# Altium PCB 智能温控风扇.PcbDoc
Units mil, origin at the board's own origin, x right, y up, seen from the top; angles counter-clockwise.
Board outline 3411.14 x 3030.03 mil, 2 copper layers (Top Layer, Bottom Layer); 30 components, 32 nets, 150 pads, 24 vias.
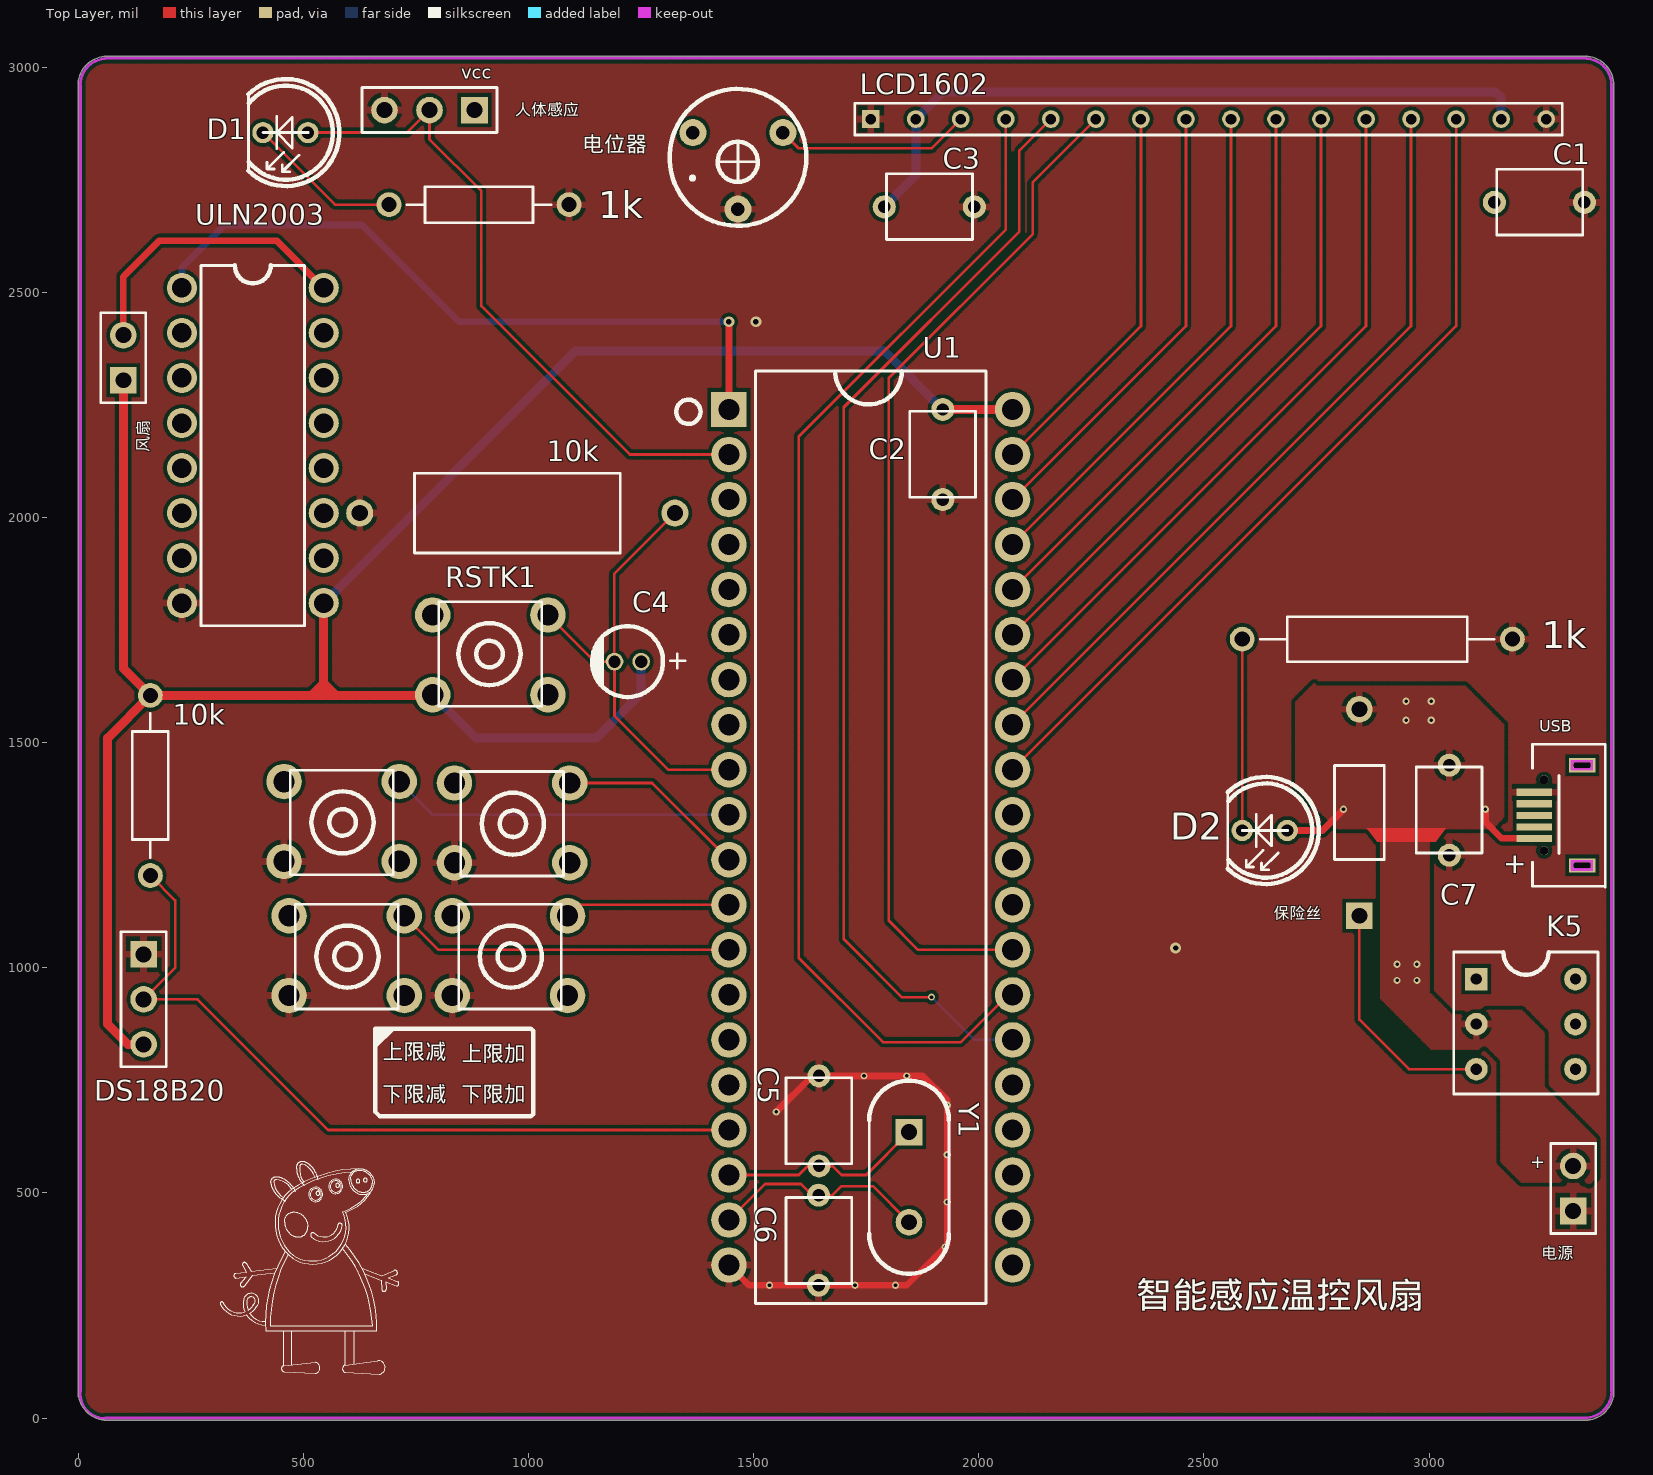
[diagram p0: Top Layer view]
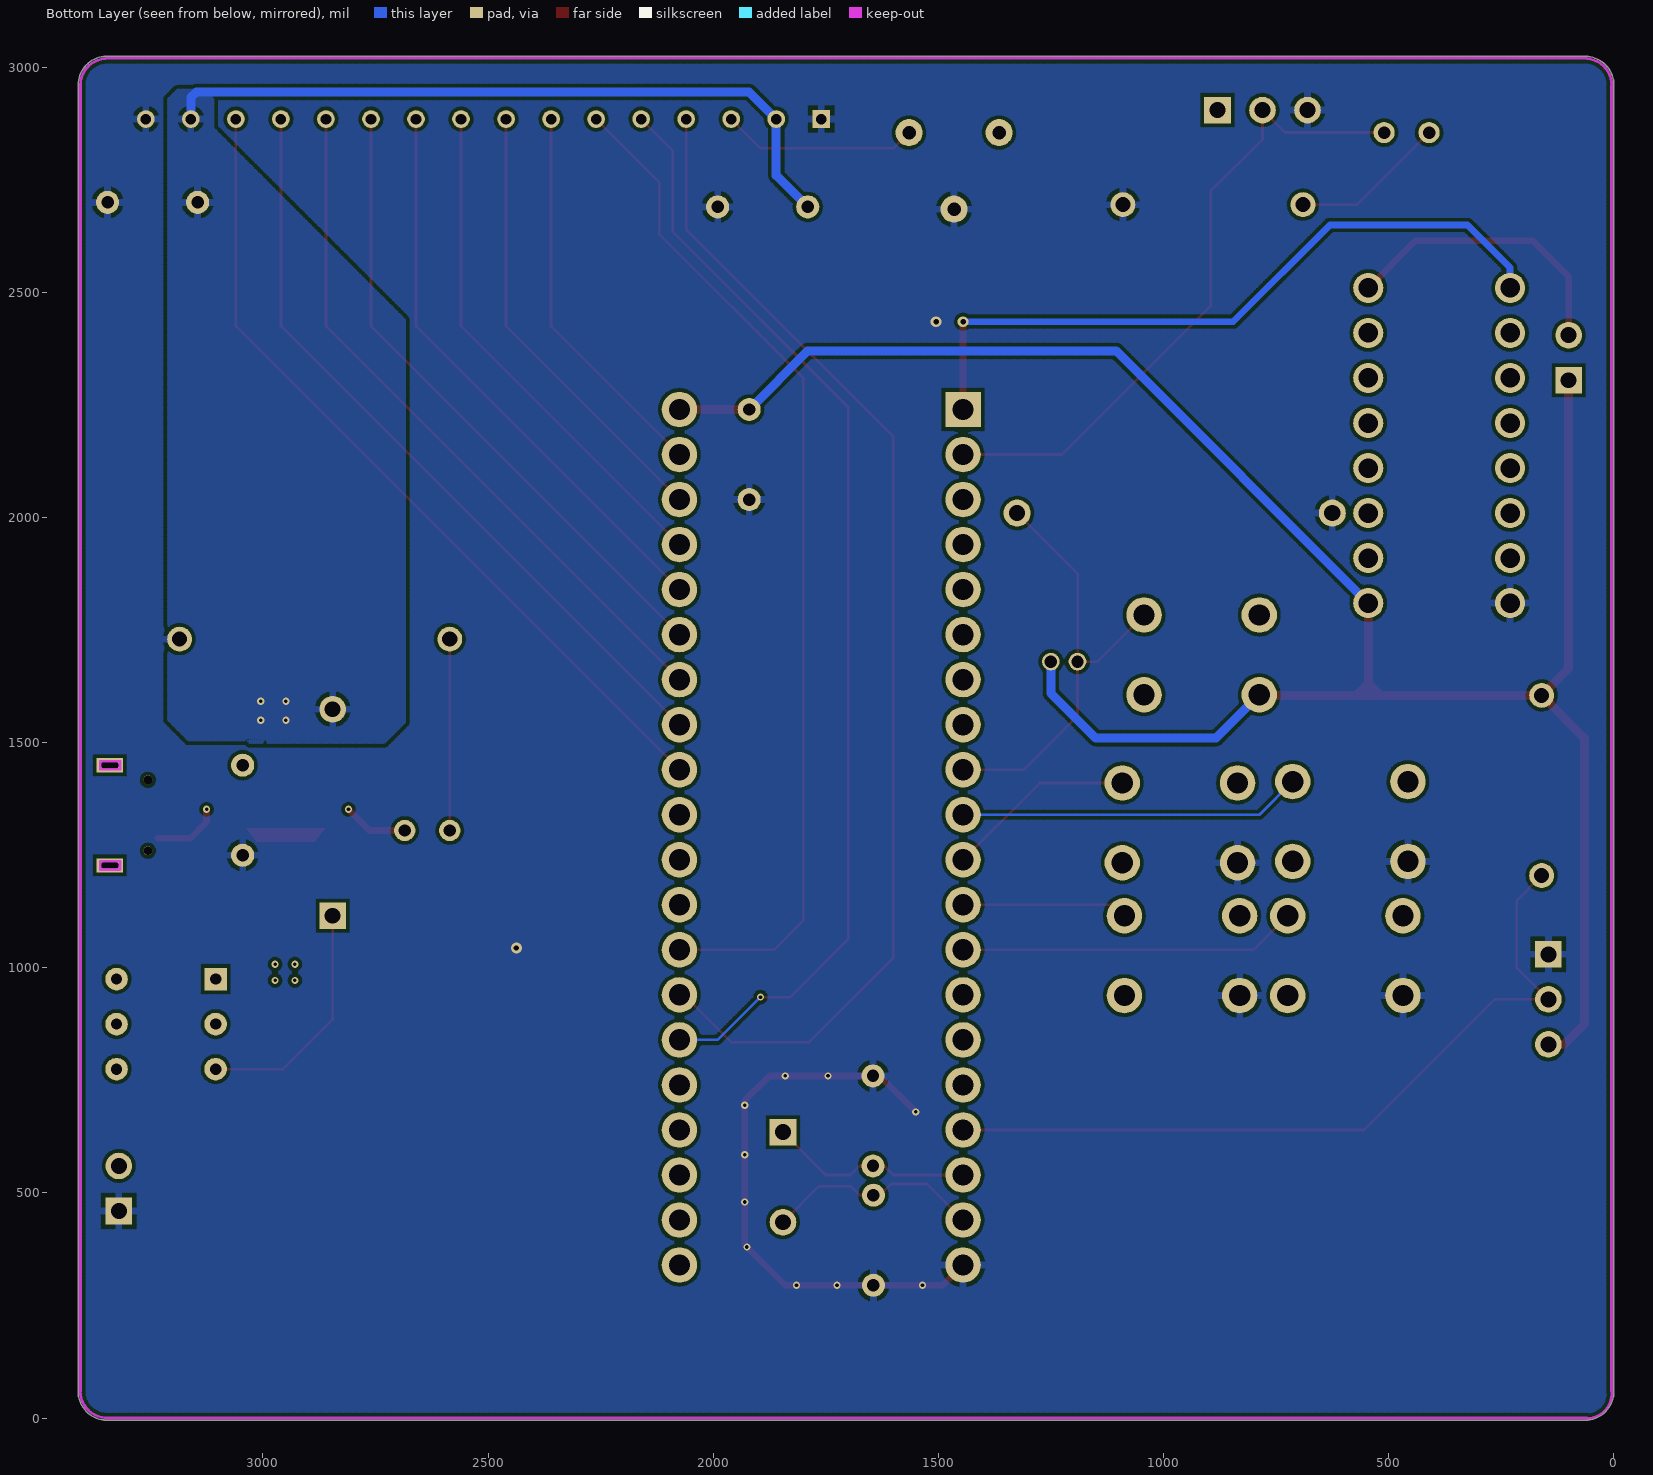
[diagram p1: Bottom Layer view, seen from below]

## Layer stack, top to bottom
Top Solder: solder mask 0.4, Solder Resist, Dk 3.5
Top Layer: signal copper 1.4
Dielectric 1: dielectric 12.6, FR-4, Dk 4.8
Bottom Layer: signal copper 1.4
Bottom Solder: solder mask 0.4, Solder Resist, Dk 3.5

## Board outline
-0.57,59.66 ccw(c63.67,59.66) 56.71,-4.2 ccw(c59.45,0) 59.45,-5.02 3350.55,-5.02 ccw(c3350.55,0) 3353.29,-4.2 ccw(c3346.33,59.66) 3410.57,59.66 ccw(c3405.55,59.66) 3410.02,61.95 3410.02,2959 ccw(c3405.28,2960.64) 3410.29,2960.64 ccw(c3346.64,2960.64) 3353.35,3023.93 ccw(c3350.24,3020) 3350.24,3025.02 60.03,3025.02 ccw(c60,3020) 57.37,3024.27 ccw(c63.67,2960.34) -0.57,2960.34 ccw(c4.45,2960.34) -0.01,2958.05 -0.01,61.95 ccw(c4.45,59.66)

## Design rules (kind name [scope] priority, off if disabled: settings)
Clearance [All] p1: gap=8
Clearance poly-all [InPolygon] p2: gap=8
Clearance via-poly [ISVIA vs INPolygon] p3: gap=5
ComponentClearance [All] p1: gap=0 collisioncheckmode=3 verticalgap=0 showdistances=FALSE
HoleToHoleClearance [All] p1: gap=1 allowstackedmicrovias=TRUE
MinimumSolderMaskSliver [All] p1: minsoldermaskwidth=1
PolygonConnect PolygonConnect_via [ISvia] p1: connectstyle=Direct reliefconductorwidth=10 reliefentries=4 polygonreliefangle="90 Angle" airgapwidth=10
PolygonConnect [All] p2: connectstyle=Relief reliefconductorwidth=15 reliefentries=4 polygonreliefangle="90 Angle" airgapwidth=10
RoutingVias [All] p1: holewidth=12 width=24 viastyle="Through Hole" minholewidth=12 minwidth=24 maxholewidth=12 maxwidth=24
SilkToSilkClearance [All] p1: silktosilkclearance=0
SilkToSolderMaskClearance [IsPad] p1: minsilkscreentomaskgap=2.5 clearancetoexposedcopper=TRUE
SolderMaskExpansion [All] p1: expansion=4
Width PWR [InNetClass('PWR')] p1: maxlimit=60 minlimit=5 preferedwidth=15
Width [All] p2: maxlimit=6 minlimit=6 preferedwidth=6
24 further rules are at their usual default settings.

## Classes and differential pairs
component class 智能温控风扇: 1k 10k C1 C2 C3 C4 C5 C6 C7 D1 D2 DS18B20 K5 RSTK1 U1 ULN2003 USB Y1 上限减 上限加 下限减 下限加 人体感应 保险丝 电源 风扇
net class PWR: 5V GND NetP1_2 P1.0

## Components (designator, comment, footprint, x,y, rotation, side; value= is the part's Value field where it differs from the comment)
1k "Res2" AXIAL-0.6 2885,1730 r0 top (schematic designator R5)
1k "Res2" AXIAL-0.4 890,2695 r0 top (schematic designator R4)
10k "Res2" AXIAL-0.4 160,1405 r90 top (schematic designator R3)
10k "Res2" AXIAL-11.5X4.5(2WS) 975,2010 r180 top (schematic designator R2)
C1 "Cap" CAP-CT4G-0805-5.08MM 3245,2700 r180 top
C2 "Cap" CAP-CT4G-0805-5.08MM 1920,2140 r270 top
C3 "Cap" CAP-CT4G-0805-5.08MM 1890,2690 r180 top
C4 "Cap Pol1" CAP-D4.0XF1.5 1220.45,1680 r270 top
C5 "Cap" CAP-CT4G-0805-5.08MM 1645,660 r270 top
C6 "Cap" CAP-CT4G-0805-5.08MM 1644.03,395 r90 top
C7 "Cap" CAP-CT4G-0805-5.08MM 3045,1350 r270 top
D1 "led2" LED-5MM-2.54MM 460,2855 r180 top
D2 "led1" LED-5MM-2.54MM 2635,1305 r180 top
DS18B20 "温度传感器" HDR1X3 145,1030 r270 top
K5 "自锁开关" "SWICH - duplicate" 3105,975 r0 top
LCD1602 "Comment" MHDR1X16 1760,2885 r0 top
RSTK1 "轻触按键" 独立按键 915,1695 r0 top
U1 "89C51" 89c51 1760,1290 r0 top
ULN2003 "ULN2003" PDIP-16 387.52,2160 r270 top (schematic designator U2)
USB "CON2" MicroUSB1 3233.7,1287.6 r90 top (schematic designator J1)
Y1 "12M" XTAL 1845,535 r270 top
上限减 "轻触按键" 独立按键 585,1325 r180 top (schematic designator K2)
上限加 "轻触按键" 独立按键 963.4,1321.95 r180 top (schematic designator K1)
下限减 "轻触按键" 独立按键 596.04,1026.95 r180 top (schematic designator K4)
下限加 "轻触按键" 独立按键 958.68,1026.95 r180 top (schematic designator K3)
人体感应 "红外感应" HDR1X3 880,2905 r180 top (schematic designator P2)
保险丝 "Fuse 1" PIN-W2/E2.8 2845,1345 r90 top (schematic designator F1)
电位器 "Comment" RES-ADJ_3362P 1465,2790 r270 top
电源 "电源" HDR1X2 3320,460 r90 top (schematic designator P3)
风扇 "驱动" HDR1X2 100,2305 r90 top (schematic designator P1)

## Footprints (in the part's own frame and the unit in brackets; to place one, negate y for a bottom-side part, rotate by r counter-clockwise, add the part's x,y. Pads: shape width x height; smd on the part's side, far side on the other; paste and mask are expansions set on the pad)
89c51 [mm]
  rect 2x2 hole 1.2: 1(-8,24.13)
  round 2 hole 1.2: 2(-8,21.59) 3(-8,19.05) 4(-8,16.51) 5(-8,13.97) 6(-8,11.43) 7(-8,8.89) 8(-8,6.35) 9(-8,3.81) 10(-8,1.27) 11(-8,-1.27) 12(-8,-3.81) 13(-8,-6.35) 14(-8,-8.89) 15(-8,-11.43) 16(-8,-13.97) 17(-8,-16.51) 18(-8,-19.05) 19(-8,-21.59) 20(-8,-24.13) 21(8,-24.13) 22(8,-21.59) 23(8,-19.05) 24(8,-16.51) 25(8,-13.97) 26(8,-11.43) 27(8,-8.89) 28(8,-6.35) 29(8,-3.81) 30(8,-1.27) 31(8,1.27) 32(8,3.81) 33(8,6.35) 34(8,8.89) 35(8,11.43) 36(8,13.97) 37(8,16.51) 38(8,19.05) 39(8,21.59) 40(8,24.13)
  silkscreen extent -10.97,-26.3 6.5,26.3, body extent -7.75,-26.17 7.75,26.43, height 4.99
AXIAL-0.4 [mm] "Axial Device, Thru-Hole; 2 Leads; 0.4 in Pin Spacing"
  round 1.4 hole 0.85: 1(-5.08,0) 2(5.08,0)
  silkscreen extent -4.06,-1.02 4.06,1.02
AXIAL-0.6 [mm] "Axial Device, Thru-Hole; 2 Leads; 0.6 in Pin Spacing"
  round 1.4 hole 0.85: 1(-7.62,0) 2(7.62,0)
  silkscreen extent -6.6,-1.27 6.6,1.27, body extent -8.02,-2 8.02,2, height 5
AXIAL-11.5X4.5(2WS) [mil]
  round 60 hole 36: 1(-350,0) 2(350,0)
  silkscreen extent -228,-89 228,89
CAP-CT4G-0805-5.08MM [mm]
  round 1.3 hole 0.7: 1(-2.54,0) 2(2.54,0)
  silkscreen extent -2.44,-1.87 2.41,1.84
CAP-D4.0XF1.5 [mm]
  round 1 hole 0.7: 1(0,0.751) 2(0,-0.751)
  silkscreen extent -2,-2.03 2,3.23
HDR1X2 [mm] "Connector; Header; 2 Position"
  rect 1.5x1.5 hole 0.9: 1(0,0)
  round 1.5 hole 0.9: 2(2.54,0)
  silkscreen extent -1.27,-1.27 3.81,1.27
HDR1X3 [mm] "Connector; Header; 3 Position"
  rect 1.5x1.5 hole 0.9: 1(0,0)
  round 1.5 hole 0.9: 2(2.54,0) 3(5.08,0)
  silkscreen extent -1.27,-1.27 6.35,1.27
LED-5MM-2.54MM [mil]
  round 47.24 hole 27.56: 1(-50,0) 2(50,0)
  silkscreen extent -120,-119 82,119
MHDR1X16 [mm] "Connector; Header; 16 Position"
  rect 1x1 hole 0.6: 1(0,0)
  round 1 hole 0.6: 2(2.54,0) 3(5.08,0) 4(7.62,0) 5(10.16,0) 6(12.7,0) 7(15.24,0) 8(17.78,0) 9(20.32,0) 10(22.86,0) 11(25.4,0) 12(27.94,0) 13(30.48,0) 14(33.02,0) 15(35.56,0) 16(38.1,0)
  silkscreen extent -0.9,-0.9 39,0.9
MicroUSB1 [mm] "MircroUSBĸͷ"
  rect 0.4x2 smd: 1(0,0) 2(0.65,0) 3(1.3,0) 4(1.95,0) 5(2.6,0)
  rect 0.8x1.5 hole 0.4 slot 1 at 90 deg: 6(-1.525,-2.7) 6(4.125,-2.7)
  round 0.5 hole 0.5 unplated: ""(-0.7,-0.55) ""(3.3,-0.55)
  Keep-Out Layer lines w0.152: -1.754,-2.125 -1.296,-2.125 -1.296,-3.243 -1.754,-3.243 -1.754,-2.125 ; 3.896,-2.125 4.354,-2.125 4.354,-3.243 3.896,-3.243 3.896,-2.125
  silkscreen extent -2.75,-4 5.3,0.1
PDIP-16 [mm]
  round 1.7 hole 1.1: 1(-8.89,-4) 2(-6.35,-4) 3(-3.81,-4) 4(-1.27,-4) 5(1.27,-4) 6(3.81,-4) 7(6.35,-4) 8(8.89,-4) 9(8.89,4) 10(6.35,4) 11(3.81,4) 12(1.27,4) 13(-1.27,4) 14(-3.81,4) 15(-6.35,4) 16(-8.89,4)
  silkscreen extent -10.16,-2.92 10.16,2.92
PIN-W2/E2.8 [mm] "Thru-Hole; 2 Leads"
  rect 1.5x1.5 hole 0.9: 1(-5.825,0)
  round 1.5 hole 0.9: 2(5.825,0)
  silkscreen extent -2.65,-1.4 2.65,1.4
RES-ADJ_3362P [mil]
  round 60 hole 30: 1(-65,100) 2(105,0) 3(-65,-100)
  silkscreen extent -162,-152 142,152
"SWICH - duplicate" [mil]
  rect 50x50 hole 25: 1(0,0)
  round 50 hole 25: 2(0,-100) 3(0,-200) 4(220,-200) 5(220,-100) 6(220,0)
  silkscreen extent -50,-255 270,60
XTAL [mm]
  rect 1.5x1.5 hole 0.9: 1(-2.54,0)
  round 1.5 hole 0.9: 2(2.54,0)
  silkscreen extent -5.45,-2.25 5.45,2.25
独立按键 [mm]
  round 2 hole 1.2: 1(3.25,-2.25) 2(-3.25,-2.25) 3(3.25,2.25) 4(-3.25,2.25)
  silkscreen extent -2.9,-2.9 2.9,3

## Part data
1k 1k 10k 10k: "Resistor"
C1 C2 C3 C5 C6 C7: "Capacitor"
C4: "Polarized Capacitor (Radial)"
D1 D2: library part "Photo Sen", "Photosensitive Diode"
DS18B20 人体感应: library part "Header 3", "Header, 3-Pin"
K5: library part "Header 3X2A", "Header, 3-Pin, Dual row"
ULN2003: library part "Header 9X2", "Header, 9-Pin, Dual row"
USB: library part CON2_1
Y1: library part XTAL, "Crystal Oscillator"
保险丝: "Fuse"
电源 风扇: library part "Header 2", "Header, 2-Pin"

## Via types
v1: diameter 16, hole 8, Top Layer to Bottom Layer, tented both sides, 20 vias
v2: diameter 24, hole 12, Top Layer to Bottom Layer, tented both sides, 3 vias
v3: diameter 16, hole 8, Top Layer to Bottom Layer, 1 vias

## Nets (pads, with @x,y where several pads share a name; then routed paths per layer and width w, separated by ;. In a path a pad name is that pad's centre, name@x,y a point inside that pad or via, vN(x,y) a via of type N, cw(c..) or ccw(c..) an arc to the next point about the centre after c; other vN are vias at no path point)
5V: 10k.2@160,1605 C1.2 C2.1 C3.2 C4.1 C7.1 D2.1 DS18B20.3 K5.2 LCD1602.2 LCD1602.15 RSTK1.2 U1.40 ULN2003.9 USB.1 保险丝.2 电源.2 风扇.1 | length 6762.1
  Top Layer w15: D2.1 2763,1305 v1(2810,1352) ; v1(3125,1352) 3125,1324 3161.4,1287.6 USB.1
  Top Layer w20: 风扇.1 100,1665 10k.2@160,1605 ; DS18B20.3 110,830 65,875 65,1510 10k.2@160,1605 ; ULN2003.9 545,1605 ; RSTK1.2@778.58,1606.42 RSTK1.2 785.63,1605 545,1605 ; C2.1 U1.40 ; 10k.2@160,1605 545,1605
  Bottom Layer w20: ULN2003.9 1105,2370 1790,2370 C2.1 ; RSTK1.2 883.47,1510 1150,1510 1250,1610 C4.1 ; C3.2 1860,2760 LCD1602.2 1920,2945 3148,2945 3160,2933 LCD1602.15
  other v1: 2929,972 2973,972 2929,1008 2973,1008 2949,1550 3005,1550 2949,1592 3005,1592
GND: 1k.2 10k.2@625,2010 C1.1 C2.2 C3.1 C5.1 C6.1 C7.2 DS18B20.1 LCD1602.1 LCD1602.16 U1.20 ULN2003.8 USB.5 上限减.3 上限加.3 下限减.3 下限加.3 人体感应.3 电位器.2 电源.1 | length 1296.8
  Top Layer w15: U1.20 1490.04,295 C6.1 1840,295 1930,385 1930,705 1875,760 C5.1 1630,760 v1(1550,680)
  other v1: 1535,295 1725,295 1815,295 1925,380 1930,480 1930,585 1930,695 1745,760 1840,760
  other v2: 2437,1044 1505,2435
NetC1_2: 
NetD1_2: 1k.1@690,2695 D1.2 | length 346.3
  Top Layer w6: D1.2 570,2695 1k.1@690,2695
NetD2_2: 1k.1@2585,1730 D2.2 | length 425
  Top Layer w6: D2.2 1k.1@2585,1730
NetF1_1: K5.3 保险丝.1 | length 536.2
  Top Layer w6: 保险丝.1 2845,885 2955,775 K5.3
NetLCD1602_3: LCD1602.3 电位器.1 | length 436.4
  Top Layer w6: 电位器.1 1600,2820 1895,2820 LCD1602.3
NetP1_2: ULN2003.16 风扇.2 | length 651.6
  Top Layer w15: 风扇.2 100,2535 180,2615 440,2615 ULN2003.16
P0.0: LCD1602.7 U1.39 | length 863.1
  Top Layer w6: U1.39 2360,2425.04 LCD1602.7
P0.1: LCD1602.8 U1.38 | length 1004.5
  Top Layer w6: U1.38 2460,2425.04 LCD1602.8
P0.2: LCD1602.9 U1.37 | length 1145.9
  Top Layer w6: U1.37 2560,2425.04 LCD1602.9
P0.3: LCD1602.10 U1.36 | length 1287.3
  Top Layer w6: U1.36 2660,2425.04 LCD1602.10
P0.4: LCD1602.11 U1.35 | length 1428.8
  Top Layer w6: U1.35 2760,2425.04 LCD1602.11
P0.5: LCD1602.12 U1.34 | length 1570.2
  Top Layer w6: U1.34 2860,2425.04 LCD1602.12
P0.6: LCD1602.13 U1.33 | length 1711.6
  Top Layer w6: U1.33 2960,2425.04 LCD1602.13
P0.7: LCD1602.14 U1.32 | length 1853
  Top Layer w6: U1.32 3060,2425.04 LCD1602.14
P1.0: U1.1 ULN2003.1 | length 1583.4
  Top Layer w15: v2(1445,2435) v2(1445,2435) U1.1
  Bottom Layer w15: ULN2003.1 230.04,2555.04 325,2650 630,2650 845,2435 v2(1445,2435)
P1.1: D1.1 U1.2 人体感应.2 | length 1460.1
  Top Layer w6: D1.1 730,2855 人体感应.2 780,2840 895,2725 895,2470 1225,2140 U1.2
P2.0: U1.21
P2.1: U1.22
P2.5: LCD1602.5 U1.26 | length 2479.5
  Top Layer w6: v3(1895,935) 1828.58,935 1700,1063.58 1700,2245 2090,2635 2090,2815 LCD1602.5
  Bottom Layer w6: v3(1895,935) 1990,840 U1.26
P2.6: LCD1602.4 U1.27 | length 2649.4
  Top Layer w6: LCD1602.4 2060,2640 1600,2180 1600,1022.16 1787.16,835 1960,835 2065,940 U1.27
P2.7: LCD1602.6 U1.28 | length 2272.4
  Top Layer w6: U1.28 1865,1040 1800,1105 1800,2310 2120,2630 2120,2745 LCD1602.6
P3.0: U1.10 上限减.2 | length 762.6
  Bottom Layer w6: 上限减.2 786.53,1340 U1.10
P3.1: U1.11 上限加.2 | length 424.3
  Top Layer w6: 上限加.2 1274.51,1410.53 U1.11
P3.2: U1.12 下限加.2 | length 368.5
  Top Layer w6: 下限加.2 1111.1,1140 U1.12
P3.3: U1.13 下限减.2 | length 752.3
  Top Layer w6: 下限减.2 799.52,1040 U1.13
P3.7: 10k.1@160,1205 DS18B20.2 U1.17 | length 1746.9
  Top Layer w6: 10k.1@160,1205 215,1150 215,1000 DS18B20.2 265,930 555,640 U1.17
RST: 10k.1@1325,2010 C4.2 RSTK1.3 U1.9 | length 1001.5
  Top Layer w6: RSTK1.3 1146.53,1680 C4.2 ; 10k.1@1325,2010 1190,1875 1190,1680.9 C4.2 ; U1.9 1310,1440 1190.9,1559.1 C4.2
VCC: 人体感应.1
XT1: C5.2 U1.18 Y1.1 | length 455.9
  Top Layer w6: U1.18 1600,540 1620,560 C5.2 1675,560 1695,540 1750,540 Y1.1
XT2: C6.2 U1.19 Y1.2 | length 484.9
  Top Layer w6: U1.19 1525.04,520 1605,520 1630,495 C6.2 1675,495 1695,515 1765,515 Y1.2
pads on no net: K5.1 K5.4 K5.5 K5.6 RSTK1.1 RSTK1.4 U1.3 U1.4 U1.5 U1.6 U1.7 U1.8 U1.14 U1.15 U1.16 U1.23 U1.24 U1.25 U1.29 U1.30 U1.31 ULN2003.2 ULN2003.3 ULN2003.4 ULN2003.5 ULN2003.6 ULN2003.7 ULN2003.10 ULN2003.11 ULN2003.12 ULN2003.13 ULN2003.14 ULN2003.15 USB. USB.2 USB.3 USB.4 USB.6 上限减.1 上限减.4 上限加.1 上限加.4 下限减.1 下限减.4 下限加.1 下限加.4 电位器.3

## Polygon pours and split planes (outlines as drawn)
GND on Top Layer "Top Solder-No Net" (hatched 90Degree grid 4 track 5, remove dead copper): 1.32,60.26 cw(c4.32,59.99) 1.99,61.9 1.99,2958.6 cw(c4.45,2960.34) 1.43,2960.34 cw(c63.67,2960.34) 58.08,3022.33 cw(c60,3020) 60.02,3023.02 3350.24,3023.02 cw(c3350.24,3020) 3352.38,3022.12 3352.37,3022.13 3352.49,3022 cw(c3346.64,2960.64) 3408.29,2960.64 cw(c3405.28,2960.64) 3408.02,2959.38 3408.02,61.4 cw(c3405.55,59.66) 3408.57,59.66 cw(c3346.33,59.66) 3352.53,-2.27 cw(c3350.55,0) 3350.55,-3.02 61.62,-3.02 cw(c59.47,-0.9) 59.44,-3.91 cw(c60,55)
5V on Top Layer "Top Solder-No Net" (hatched 90Degree grid 4 track 5, remove dead copper, pour order 6): 3075,905 3205,905 3255,855 3255,845 3255,735 3295,695 3370,620 3370,535 3355,520 3350,525 3210,525 3205,525 3175,555 3160,570 3160,790 3160,795 3135,820 3127,828 3090,828
5V on Top Layer "Top Solder-No Net" (hatched 90Degree grid 4 track 5, remove dead copper, pour order 12): 3135,895 3135,845 3130,840 3110,820 3065,820 3005,820 2915,910 2893,932 2893,1340 2950,1340 2990,1300 3000,1290 3000,940 3005,940 3045,900 3050,895 3115,895 3125,895 3135,885
5V on Top Layer "Top Solder-No Net" (hatched 90Degree grid 4 track 5, remove dead copper, pour order 4): 3165,1330 3165,1540 3080,1625 2750,1625 2745,1630 2705,1590 2705,1510 2705,1400 2725,1380 2795,1310 3140,1310 3165,1335
GND on Bottom Layer "Top Solder-No Net" (hatched 90Degree grid 4 track 5, remove dead copper, pour order 12): 1.32,60.26 cw(c4.32,59.99) 1.99,61.9 1.99,2958.6 cw(c4.45,2960.34) 1.43,2960.34 cw(c63.67,2960.34) 58.08,3022.33 cw(c60,3020) 60.02,3023.02 3350.24,3023.02 cw(c3350.24,3020) 3352.38,3022.12 3352.37,3022.13 3352.49,3022 cw(c3346.64,2960.64) 3408.29,2960.64 cw(c3405.28,2960.64) 3408.02,2959.38 3408.02,61.4 cw(c3405.55,59.66) 3408.57,59.66 cw(c3346.33,59.66) 3352.53,-2.27 cw(c3350.55,0) 3350.55,-3.02 61.62,-3.02 cw(c59.47,-0.9) 59.44,-3.91 cw(c60,55)
5V on Bottom Layer "Top Solder-No Net" (hatched 90Degree grid 4 track 5, remove dead copper, pour order 9): 3040,1510 3030,1500 2760,1500 2730,1500 2685,1545 2685,2440 2955,2710 3110,2865 3110,2915 3110,2930 3125,2945 3130,2950 3185,2950 3190,2950 3210,2930 3210,1550 3165,1505 3000,1505 2995,1500 2990,1505 2940,1505

## Keep-outs
Keep-Out Layer:
  lines w6: 4.32,59.99 ccw(c60,55) 59.47,-0.9 ; 4.45,2960.34 cw(c63.67,2960.34) 59.45,3019.41 ; 5,59.66 5,2960.34 ; 59.45,0 3350.55,0 ; 3350.55,0.59 ccw(c3346.33,59.66) 3405.55,59.66 ; 3350.82,3019.12 cw(c3346.64,2960.64) 3405.28,2960.64 ; 3350.84,3019.39 3350.24,3020 60,3020 ; 3405,59.66 3405,2960.64 ; 60,3020 60,3020

## Other copper
Top Layer:
  region net 5V: 2861,1310 2885,1280 3015,1280 3037,1310
  region net 5V: 545,1645 505,1605 585,1605

## Silkscreen, mask and mechanical layers (free items; w line width, h text height)
Top Overlay:
  drawing of 1865 lines, arcs and shapes, not listed
  text "vcc" at 850,2965 h50
  text "+" at 3225,545 h50
  text "智能感应温控风扇" at 2350,225 h100

## Text inside footprints (layer, text, board x,y; h text height)
USB: Top Overlay "+" at 3209.76,1203.46 h45 r90